# EAGLE board sequencer (EAGLE 7.6.0)
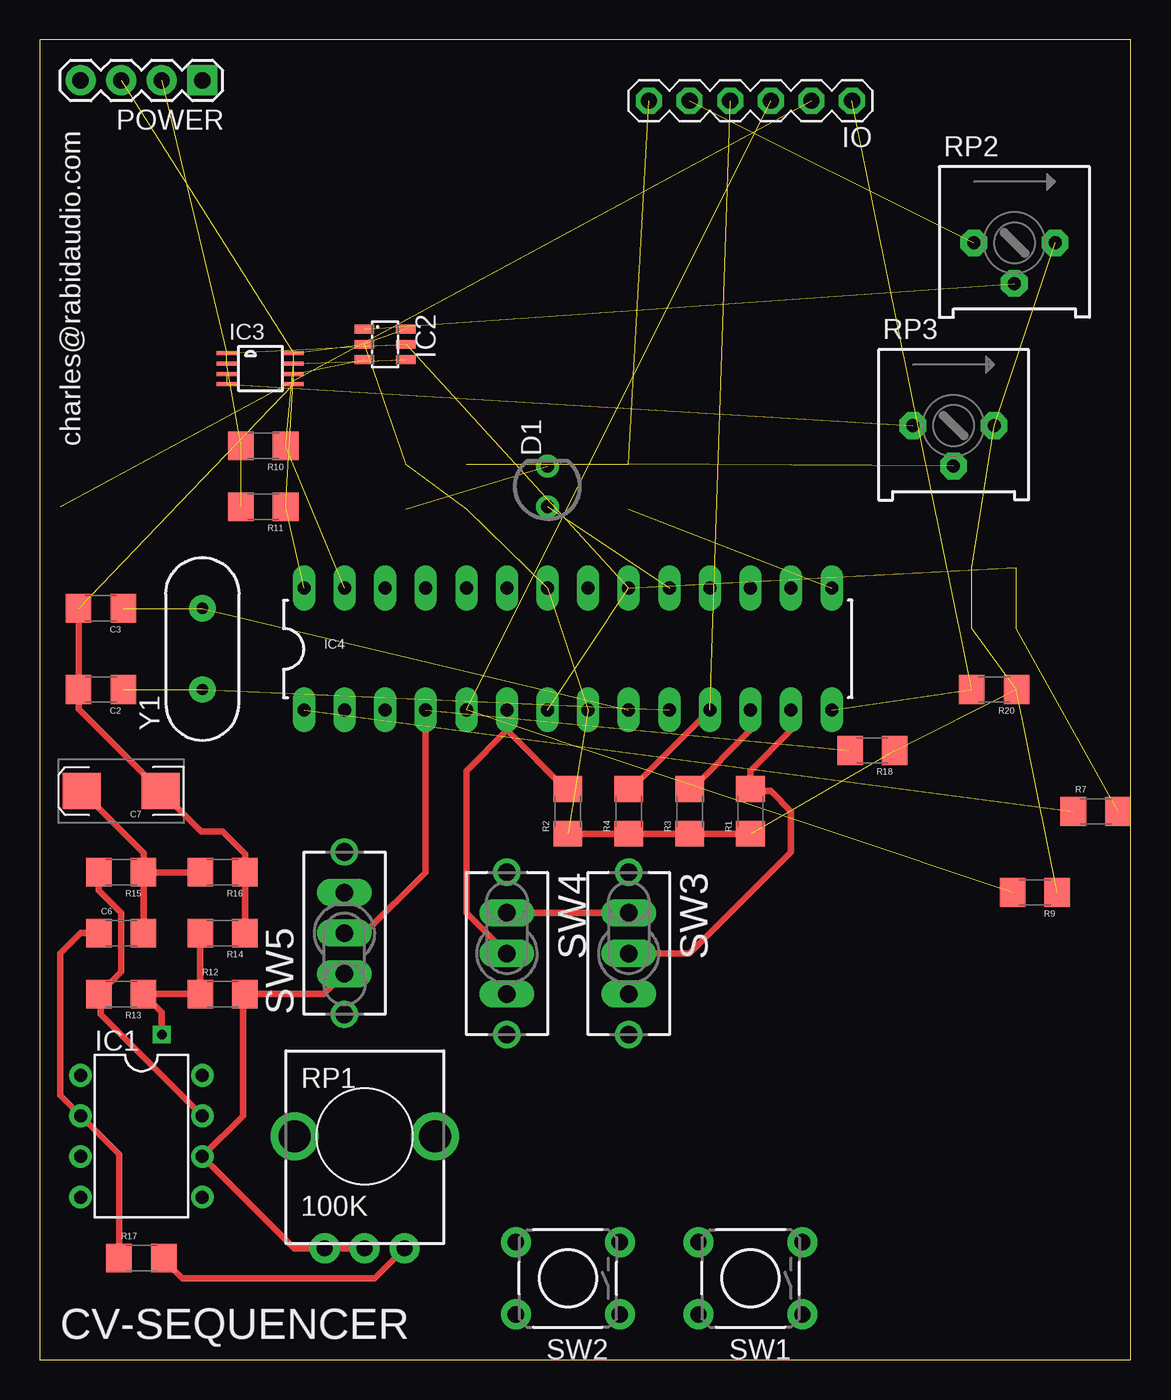
[diagram p0: board, top side]
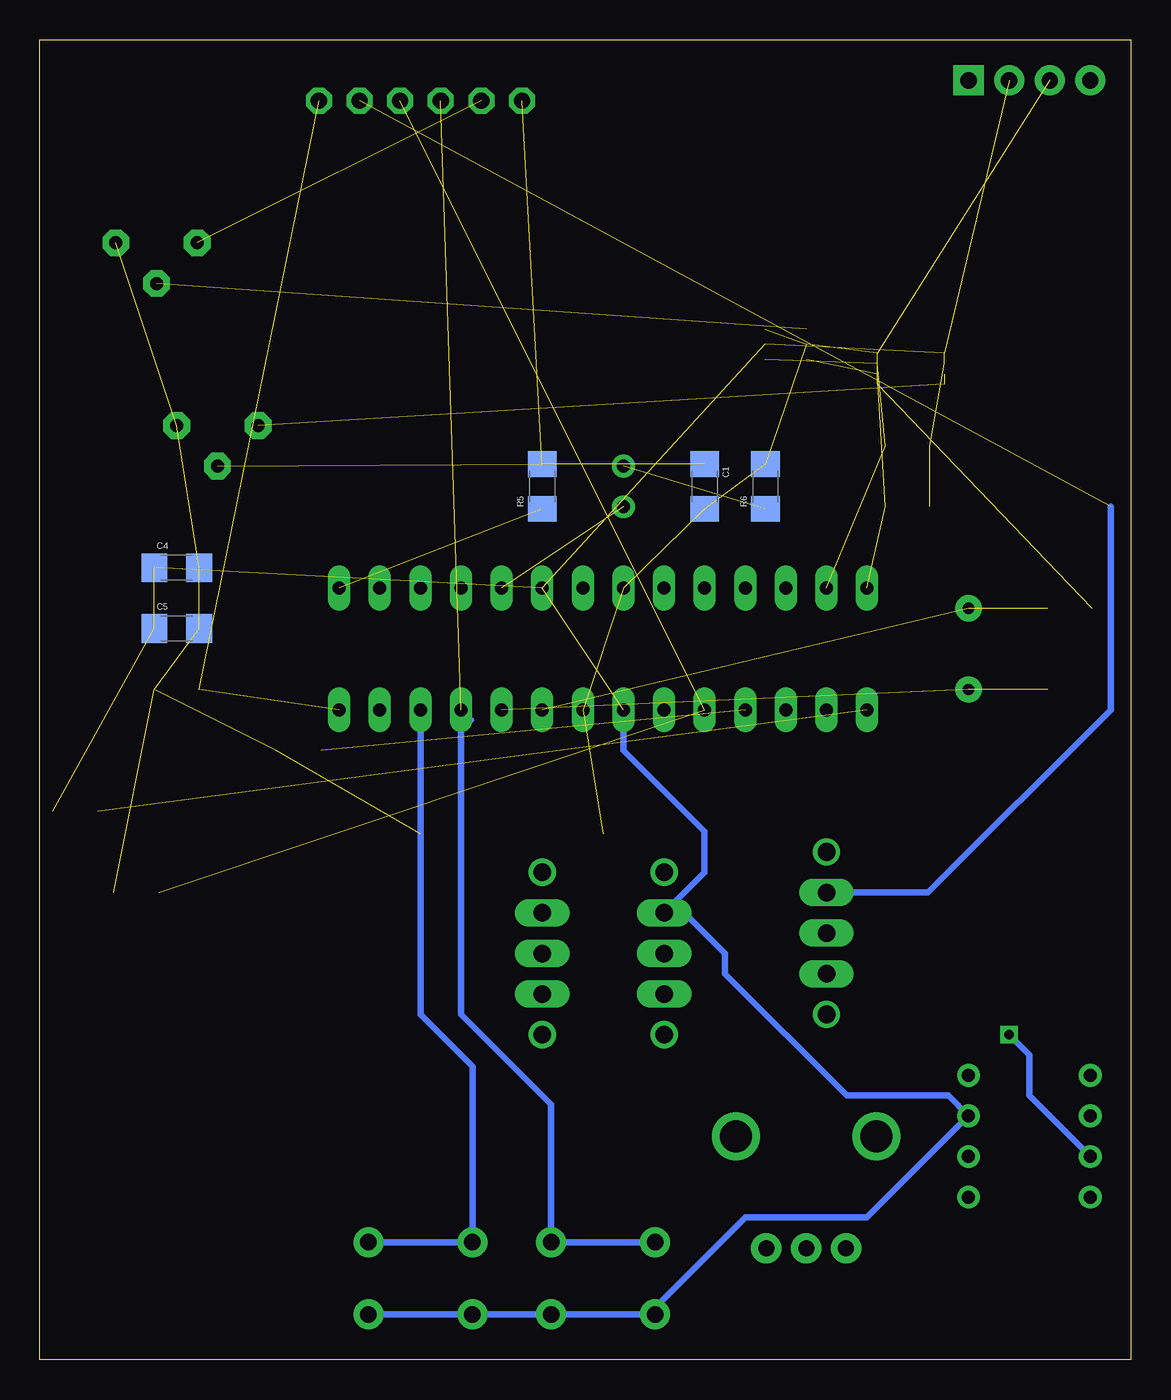
[diagram p1: board, bottom side, seen from below]

Size 68.25 x 82.54 mm. Coordinates in mm from the lower left corner, seen from the top.
Outline: 0,0 68.25,0 68.25,82.54 0,82.54 0,0
Copper layers (1*16): Top 0.035mm / dielectric 1.5mm / Bottom 0.035mm
Design rules "SparkFun": minimum track width 8mil, minimum drill 20mil, track to track 8mil, track to pad 8mil, pad to pad 8mil, via to via 8mil, smd to smd 8mil, copper to edge 8mil, drill to drill 8mil, minimum pad ring 12mil, minimum via ring 10mil, stop-mask expansion 4mil, vias tented up to drill 20mil, thermal gap 10mil

## Footprints (pad centres in the part's own frame; a part is rotated, then mirrored left to right if it is on the bottom)
1206 = smd 1.6 x 1.8: 1 -1.4,0; 2 1.4,0
EIA6032-NOM = smd 2.37 x 2.23: A 2.47,0; C -2.47,0
LED3MM-NS = drill 0.813: A -1.27,0; K 1.27,0
DIL08 = drill 0.813 pad 1.27: 1 -3.81,-3.81; 2 -1.27,-3.81; 3 1.27,-3.81; 4 3.81,-3.81; 5 3.81,3.81; 6 1.27,3.81; 7 -1.27,3.81; 8 -3.81,3.81
SOT-23-6 = smd 0.55 x 1.2: 1 -0.95,-1.3; 2 0,-1.3; 3 0.95,-1.3; 4 0.95,1.3; 5 0,1.3; 6 -0.95,1.3
8MSOP = smd 0.25 x 1.254: 1 0.549,-3.575; 2 1.199,-3.575; 3 1.849,-3.575; 4 2.499,-3.575; 5 2.499,0.627; 6 1.849,0.627; 7 1.199,0.627; 8 0.549,0.627
DIL28-3 = drill 0.813 long: 1 -16.51,-3.81; 2 -13.97,-3.81; 3 -11.43,-3.81; 4 -8.89,-3.81; 5 -6.35,-3.81; 6 -3.81,-3.81; 7 -1.27,-3.81; 8 1.27,-3.81; 9 3.81,-3.81; 10 6.35,-3.81; 11 8.89,-3.81; 12 11.43,-3.81; 13 13.97,-3.81; 14 16.51,-3.81; 15 16.51,3.81; 16 13.97,3.81; 17 11.43,3.81; 18 8.89,3.81; 19 6.35,3.81; 20 3.81,3.81; 21 1.27,3.81; 22 -1.27,3.81; 23 -3.81,3.81; 24 -6.35,3.81; 25 -8.89,3.81; 26 -11.43,3.81; 27 -13.97,3.81; 28 -16.51,3.81
06X1-PTH = drill 1.016 octagon: 1 -6.35,0; 2 -3.81,0; 3 -1.27,0; 4 1.27,0; 5 3.81,0; 6 6.35,0
1X04 = drill 1.016 pad 1.88 square: 1 0,0 | drill 1.016 pad 1.88: 2 2.54,0; 3 5.08,0; 4 7.62,0
ALPS_POT_KIT = drill 1 pad 1.88: P$1 7,-2.5; P$2 7,0; P$3 7,2.5 | drill 2: P$4 0,-4.4; P$5 0,4.4
3386P = drill 0.813 pad 1.676 octagon: 1 -2.54,0; 2 0,-2.54; 3 2.54,0
TACTILE-PTH = drill 1.016 pad 1.88: 1 -3.251,2.261; 2 3.251,2.261; 3 -3.251,-2.261; 4 3.251,-2.261
TL3XYO = drill 1.1 pad 1.422 long: 1 -2.54,0; 2 0,0; 3 2.54,0 | drill 1.1 pad 1.676: M1 -5.08,0; M2 5.08,0
HC49US = drill 0.7 pad 1.651: 1 -2.54,0; 2 2.54,0

## Placement (x,y rotation side)
C1  10n  [1206]  26.67,54.61 270 bottom
C2  22pF  [1206]  3.81,41.91 180 top
C3  22pF  [1206]  3.81,46.99 180 top
C4  .1u  [1206]  59.69,49.53 0 bottom
C5  .1u  [1206]  59.69,45.72 0 bottom
C6  1u  [1206]  5.08,26.67 0 top
C7  10UF-25V-10%(SMT-TANT)  [EIA6032-NOM]  5.08,35.56 180 top
D1  [LED3MM-NS]  31.75,54.61 90 top
IC1  LM741P  [DIL08]  6.35,13.97 270 top
IC2  [SOT-23-6]  21.59,63.5 270 top
IC3  DAC8571  [8MSOP]  15.24,63.5 270 top
IC4  ATMEGA328P_PDIP  [DIL28-3]  33.02,44.45 0 top
IO  HEADER-06X1-FEMALE  [06X1-PTH]  44.45,78.74 180 top
POWER  [1X04]  10.16,80.01 180 top
R1  10k  [1206]  44.45,34.29 90 top
R2  10k  [1206]  33.02,34.29 90 top
R3  10k  [1206]  40.64,34.29 90 top
R4  10k  [1206]  36.83,34.29 90 top
R5  100k  [1206]  36.83,54.61 90 bottom
R6  470  [1206]  22.86,54.61 90 bottom
R7  10k  [1206]  66.04,34.29 0 top
R9  10k  [1206]  62.23,29.21 180 top
R10  10k  [1206]  13.97,57.15 180 top
R11  10k  [1206]  13.97,53.34 180 top
R12  100k  [1206]  11.43,22.86 0 top
R13  100k  [1206]  5.08,22.86 180 top
R14  100k  [1206]  11.43,26.67 180 top
R15  100k  [1206]  5.08,30.48 180 top
R16  100k  [1206]  11.43,30.48 180 top
R17  680  [1206]  6.35,6.35 0 top
R18  10k  [1206]  52.07,38.1 180 top
R20  10k  [1206]  59.69,41.91 180 top
RP1  100K  [ALPS_POT_KIT]  20.32,13.97 270 top
RP2  10K  [3386P]  60.96,69.85 0 top
RP3  10K  [3386P]  57.15,58.42 0 top
SW1  [TACTILE-PTH]  44.45,5.08 180 top
SW2  [TACTILE-PTH]  33.02,5.08 180 top
SW3  [TL3XYO]  36.83,25.4 270 top
SW4  [TL3XYO]  29.21,25.4 270 top
SW5  RATE_SRC  [TL3XYO]  19.05,26.67 90 top
Y1  16MHz  [HC49US]  10.16,44.45 90 top

## Library data of the parts
C1-C6 = SparkFun-Capacitors
C7 = SparkFun-Capacitors; PROD_ID: CAP-12984
D1 = SparkFun-LED
IC1 = linear
IC2 = ads11xx
IC3 = cjk
IC4 = SparkFun-DigitalIC
IO = GeekAmmo
POWER = SparkFun-Connectors
R1-R7 R9-R18 R20 = SparkFun-Passives
RP1 = SparkFun-Electromechanical; PROD_ID: RES-09177
RP2 RP3 = bourns
SW1 SW2 = SparkFun-Retired
SW3-SW5 = switch
Y1 = SparkFun-FreqCtrl

## Nets
CLEAR: IC4.12 R3.2 SW1.3 SW1.4
CV_IN: IO.5 RP2.1
CV_OUT: C1.1 IO.6 R5.2 RP3.2
DIRECT_IN: IC2.1 RP2.2
GND: C1.2 C2.2 C3.2 C4.2 C5.2 C7.C IC2.2 IC2.6 IC3.5 IC3.8 IC4.8 IC4.22 POWER.3 R1.1 R2.1 R3.1 R4.1 R6.2 R9.1 R14.1 R16.1 R18.1 R20.1 RP2.3 RP3.3
N$1: IC4.15 R5.1
N$2: IC3.3 IC3.4 RP3.1
N$3: D1.K R6.1
N$5: IC4.1 R7.1
N$6: C3.1 IC4.9 Y1.2
N$7: C2.1 IC4.10 Y1.1
N$8: D1.A IC4.19
N$11: POWER.1
N$13: IC1.3 R12.1 R13.1 R14.2
N$14: POWER.4
N$15: R17.2 RP1.P$3
N$17: C6.2 C7.A R15.1 R16.2
N$18: C6.1 IC1.2 R17.1
PLAYBACKGATE: IC4.14 IO.1 R20.2
RATE: IC4.4 R18.2 SW5.2
RATE_EXTERNAL: IO.2 SW5.3
RATE_INTERNAL: IC1.6 R12.2 RP1.P$1 RP1.P$2 SW5.1
RECORD: IC4.11 IO.4 R4.2 SW2.3 SW2.4
REVERSE: IC4.6 R2.2 SW4.2
SCL: IC2.3 IC3.6 IC4.28 R11.1
SDA: IC2.4 IC3.7 IC4.27 R10.1
TRIGGER: IC4.5 IO.3 R9.2
TRIGGERMODE: IC4.13 R1.2 SW3.2
V-: IC1.4
VCC: C4.1 C5.1 IC1.7 IC2.5 IC3.1 IC3.2 IC4.7 IC4.20 POWER.2 R7.2 R10.2 R11.2 R13.2 R15.2 SW1.1 SW1.2 SW2.1 SW2.2 SW3.1 SW4.1

## Tracks (layer width: path | path; a pad name or v marks a point on that pad's centre or on a via)
CLEAR
  Top 0.406: R3.2 40.77,35.69 44.45,39.37 IC4.12
  Bottom 0.406: SW1.3 SW1.4 41.2,18.34 44.45,21.59 IC4.12
CV_IN  (1 unrouted)
CV_OUT  (3 unrouted)
DIRECT_IN  (1 unrouted)
GND  (17 unrouted)
  Top 0.406: C3.2 C2.2 2.41,40.7 C7.C 10.09,33.02 11.43,33.02 12.83,31.62 R16.1 R14.1 | R2.1 R4.1 R3.1 R1.1
N$1  (1 unrouted)
N$2  (2 unrouted)
N$3  (1 unrouted)
N$5  (1 unrouted)
N$6  (2 unrouted)
N$7  (2 unrouted)
N$8  (1 unrouted)
N$13  (via drill 0.6)
  Top 0.406: R14.2 R12.1 R13.1 7.62,21.72 v7.62,20.32
  Bottom 0.406: IC1.3 6.35,16.51 6.35,19.05 v7.62,20.32
N$15
  Top 0.406: R17.2 7.75,6.22 8.89,5.08 20.93,5.08 RP1.P$3
N$17
  Top 0.406: R16.2 R15.1 | R15.1 6.48,31.69 C7.A | R15.1 C6.2
N$18
  Top 0.406: C6.1 2.54,26.67 1.27,25.4 1.27,16.51 IC1.2 4.95,12.83 R17.1
PLAYBACKGATE  (2 unrouted)
RATE  (1 unrouted)
  Top 0.406: SW5.2 20.32,26.67 24.13,30.48 IC4.4
RATE_EXTERNAL  (1 unrouted)
  Bottom 0.406: SW5.3 12.7,29.21 1.27,40.64 1.27,53.34
RATE_INTERNAL
  Top 0.406: RP1.P$2 RP1.P$1 15.89,6.97 IC1.6 12.7,15.24 12.7,22.73 R12.2 17.78,22.86 SW5.1
RECORD  (1 unrouted)
  Top 0.406: R4.2 36.96,35.69 IC4.11
  Bottom 0.406: SW2.4 SW2.3 36.27,15.95 41.91,21.59 41.91,39.37 41.27,40.01 IC4.11
REVERSE
  Top 0.406: R2.2 32.89,35.69 29.21,39.37 | 29.21,39.37 IC4.6 | SW4.2 26.67,27.94 26.67,36.83 29.21,39.37
SCL  (3 unrouted)
SDA  (3 unrouted)
TRIGGER  (2 unrouted)
TRIGGERMODE
  Top 0.406: IC4.13 46.99,39.37 44.45,36.83 R1.2 44.58,35.56 45.72,35.56 46.99,34.29 46.99,31.75 40.64,25.4 SW3.2
VCC  (10 unrouted)
  Top 0.406: R15.2 3.68,29.34 5.08,27.94 5.08,24.26 R13.2 3.81,22.73 3.81,21.59 IC1.7 | SW4.1 SW3.1
  Bottom 0.406: SW1.1 SW1.2 SW2.1 SW2.2 29.77,3.25 24.13,8.89 16.51,8.89 IC1.7 11.43,16.51 17.78,16.51 25.4,24.13 25.4,25.4 27.94,27.94 SW4.1 26.67,30.48 26.67,33.02 31.75,38.1 IC4.7

## Text on the board
tPlace: charles@rabidaudio.com | CV-SEQUENCER